# Altium PCB Adafruit VEML7700 STEMMA QT.PcbDoc
Units mil, origin at the board's own origin, x right, y up, seen from the top; angles counter-clockwise.
Board outline 1000 x 700 mil, 2 copper layers (Top, Bottom); 25 components, 9 nets, 59 pads, 14 vias.
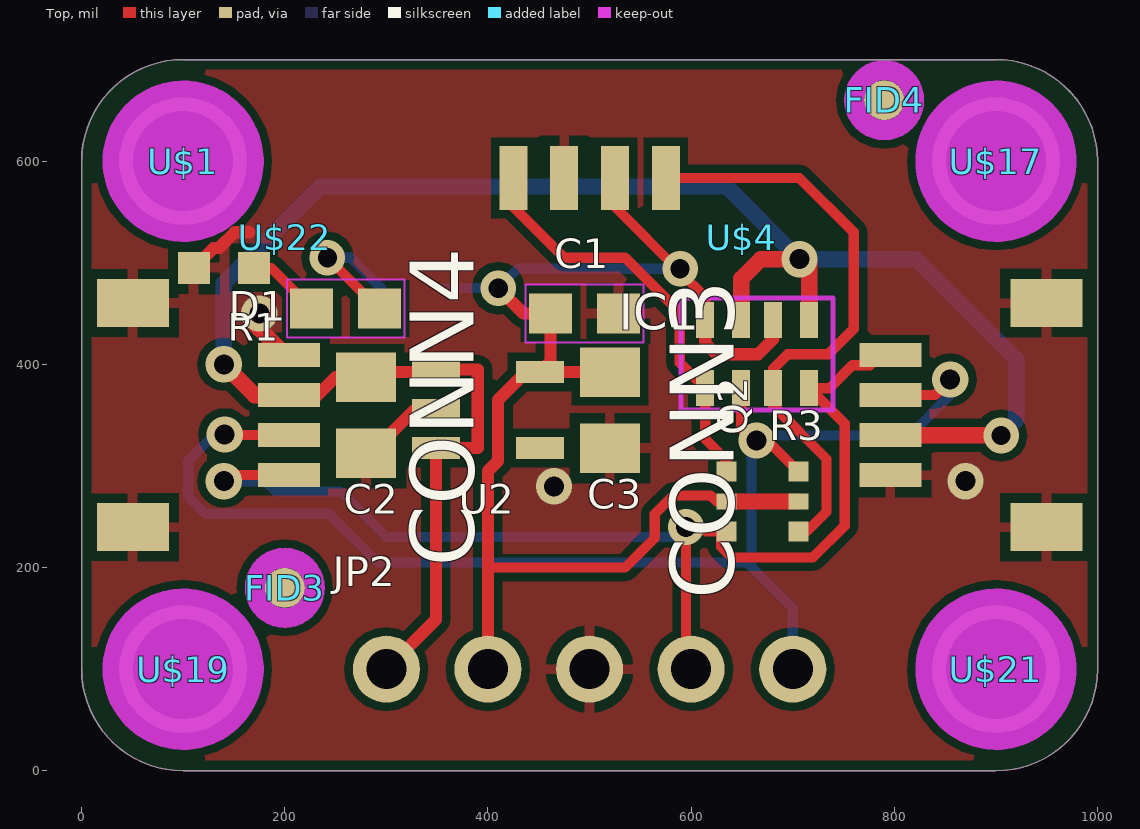
[diagram p0: Top view]
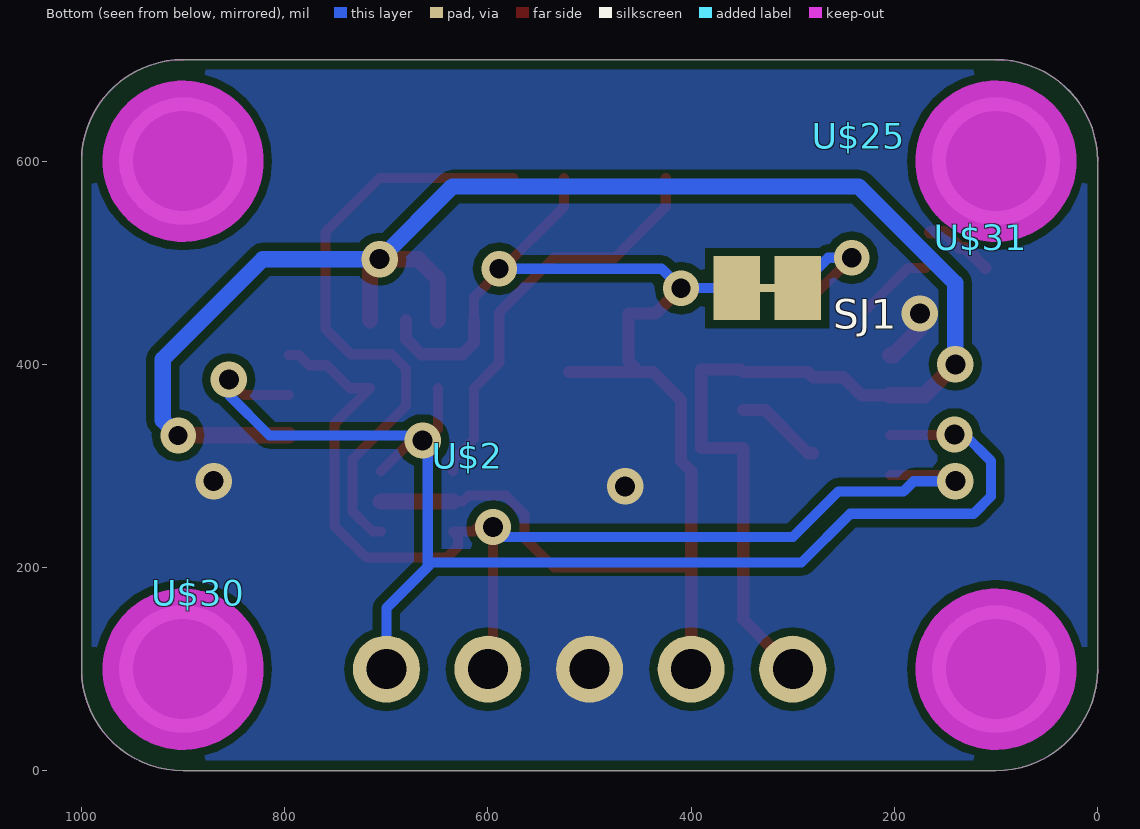
[diagram p1: Bottom view, seen from below]

## Layer stack, top to bottom
Top Solder: solder mask 0.4, Solder Resist, Dk 3.5
Top: signal copper 1.378
Dielectric 1: dielectric 12.6, FR-4, Dk 4.8
Bottom: signal copper 1.378
Bottom Solder: solder mask 0.4, Solder Resist, Dk 3.5

## Board outline
100,700 ccw(c100,600) 0,600 0,100 ccw(c100,100) 100,0 900,0 ccw(c900,100) 1000,100 1000,600 ccw(c900,600) 900,700

## Design rules (kind name [scope] priority, off if disabled: settings)
BoardOutlineClearance mdCopperDimension [All] p1: gap=10 ignorepadtopadclearanceinfootprint=FALSE except(0: Arc-SplitContinuation Track-SplitContinuation SMDPad-SplitContinuation THPad-SplitContinuation Via-SplitContinuation Fill-SplitContinuation Poly-SplitContinuation Region-SplitContinuation Text-SplitContinuation)
Clearance "Clearance (Same Net)" [All] p1: gap=8 ignorepadtopadclearanceinfootprint=FALSE
Clearance [All] p2: gap=8 ignorepadtopadclearanceinfootprint=FALSE
HoleSize HoleSize_For_NetClass_lowpower [InNetClass('lowpower')] p1: absolutevalues=TRUE maxlimit=19 minlimit=19 maxpercent=80.000 minpercent=20.000
HoleSize HoleSize_For_NetClass_highpower [InNetClass('highpower')] p2: absolutevalues=TRUE maxlimit=19 minlimit=19 maxpercent=80.000 minpercent=20.000
HoleSize [All] p3: absolutevalues=TRUE maxlimit=100000 minlimit=15.5 maxpercent=80.000 minpercent=20.000
HoleToHoleClearance mdDrill [All] p1: gap=8 allowstackedmicrovias=TRUE
MinimumSolderMaskSliver [All] p1 off: minsoldermaskwidth=10
PasteMaskExpansion Expansion_SMDPaste_OFF [InPadClass('SMDPaste_OFF')] p1: expansion=0
PasteMaskExpansion mlMinCreamFrame [All] p2: expansion=0
PolygonConnect PolygonConnect_For_PolygonThermal_ON_Width100000_Gap100000 [InPolygonClass('PolygonThermal_ON_Width100000_Gap100000') vs Not IsVia] p1: connectstyle=Relief reliefconductorwidth=10 reliefentries=4 polygonreliefangle="90 Angle" airgapwidth=10
PolygonConnect ThermalVias [IsVia] p2: connectstyle=Direct reliefconductorwidth=10 reliefentries=4 polygonreliefangle="90 Angle" airgapwidth=10
PolygonConnect [All] p3: connectstyle=Relief reliefconductorwidth=10 reliefentries=4 polygonreliefangle="90 Angle" airgapwidth=10
RoutingVias [All] p1: holewidth=15.5 width=31.5 viastyle="Through Hole" minholewidth=15.5 minwidth=31.5 maxholewidth=100 maxwidth=100
SolderMaskExpansion Expansion_SMDSolder_OFF [InPadClass('SMDSolder_OFF')] p1: expansion=0 istentingtop=FALSE
SolderMaskExpansion mlMinStopFrame [All] p2: expansion=2 istentingtop=FALSE
Width Width_For_NetClass_lowpower [InNetClass('lowpower')] p1: maxlimit=10 minlimit=10 preferedwidth=10
Width Width_For_NetClass_highpower [InNetClass('highpower')] p2: maxlimit=24 minlimit=10 preferedwidth=12
Width [All] p3: maxlimit=10 minlimit=8 preferedwidth=8
26 further rules are at their usual default settings.

## Classes and differential pairs
polygon class PolygonThermal_ON_Width100000_Gap100000: Polygon_1_Net_GND Polygon_2_Net_GND
pad class SMDSolder_OFF: SJ1-1 SJ1-2 SJ1-WIRE
pad class SMDPaste_OFF: FID3-1 FID4-1 SJ1-1 SJ1-2 SJ1-WIRE
net class lowpower: 3.3V N$2
net class highpower: GND VCC

## Components (designator, comment, footprint, x,y, rotation, side; value= is the part's Value field where it differs from the comment)
C1 "0.1uF" 0603-NO 495,450 r0 top
C2 "10uF" 0805-NO 280,350 r270 top
C3 "10uF" 0805-NO 520,355 r270 top
CONN3 "" JST_SH4 895,350 r90 top
CONN4 "" JST_SH4 105,350 r270 top
D1 "GREEN" CHIPLED_0603_NOOUTLINE 140,495 r90 top
FID3 "" FIDUCIAL_1MM 200,180 r0 top
FID4 "" FIDUCIAL_1MM 790,660 r0 top
IC1 "VEML7700" VEML7700 500,540 r180 top
JP2 "" 1X05_ROUND 500,100 r0 top
Q2 "BSS138" SOT363 670,265 r90 top
R1 "47K" 0603-NO 260,455 r180 top
R3 "4.7K" RESPACK_4X0603 665,410 r180 top
SJ1 "" SOLDERJUMPER_CLOSEDWIRE 325,475 r0 bottom
U2 "AP2112K-3.3" SOT23-5 400,355 r270 top
U$1 "" MOUNTINGHOLE_2.5_PLATED 100,600 r0 top
U$2 "" KATTNI_STOP 620,310 r180 bottom
U$4 "" ADAFRUIT_3.5MM 650,525 r0 top
U$17 "" MOUNTINGHOLE_2.5_PLATED 900,600 r0 top
U$19 "" MOUNTINGHOLE_2.5_PLATED 100,100 r0 top
U$21 "" MOUNTINGHOLE_2.5_PLATED 900,100 r0 top
U$22 "" ADAFRUIT_3.5MM 200,525 r0 top
U$25 "" PCBFEAT-REV-040 235,625 r180 bottom
U$30 "" STEMMAQT 885,175 r90 bottom
U$31 "" STEMMAQT 115,525 r270 bottom

## Footprints (in the part's own frame and the unit in brackets; to place one, negate y for a bottom-side part, rotate by r counter-clockwise, add the part's x,y. Pads: shape width x height; smd on the part's side, far side on the other; paste and mask are expansions set on the pad)
1X05_ROUND [mil] "1X05_ROUND"
  round 66 hole 39.37: 1(-200,0) 2(-100,0) 3(0,0) 4(100,0) 5(200,0)
0603-NO [mm] "0603-NO"
  rect 1.075x1 smd: 1(-0.85,0) 2(0.85,0)
  Top keep-out lines w0.051: -1.473,-0.729 -1.473,0.729 1.473,0.729 1.473,-0.729 -1.473,-0.729
0805-NO [mil] "0805-NO"
  rect 48.82x59.06 smd: 1(-37.4,0) 2(37.4,0)
ADAFRUIT_3.5MM [mil] "ADAFRUIT_3.5MM"
CHIPLED_0603_NOOUTLINE [mil] "CHIPLED_0603_NOOUTLINE"
  rect 31.5x31.5 smd: A(0,-29.53) C(0,29.53)
FIDUCIAL_1MM [mm] "FIDUCIAL_1MM"
  rrect100% 1x1 smd paste+0: 1(0,0)
  Top keep-out lines w0.5: -0.75,0 ccw(c0,0) 0,-0.75 ; -0.75,0 cw(c0,0) 0,0.75 ; -0.75,0 ccw(c0,0) 0,-0.75 ; -0.75,0 cw(c0,0) 0,0.75 ; 0,-0.75 ccw(c0,0) 0.75,0 ; 0,-0.75 ccw(c0,0) 0.75,0 ; 0,0.75 cw(c0,0) 0.75,0 ; 0,0.75 cw(c0,0) 0.75,0
JST_SH4 [mil] "JST_SH4"
  rect 23.62x61.02 smd: 1(-59.06,98.98) 2(-19.69,98.98) 3(19.69,98.98) 4(59.06,98.98)
  rect 47.24x70.87 smd: MT1(-110.24,-54.57) MT2(110.24,-54.57)
KATTNI_STOP [mil] "KATTNI_STOP"
MOUNTINGHOLE_2.5_PLATED [mil] "MOUNTINGHOLE_2.5_PLATED"
  round 125.98 hole 98.43: P$1(0,0)
  Top keep-out circle w80: c0,0 r39.37
  Top keep-out circle w80: c0,0 r39.37
  Bottom keep-out circle w80: c0,0 r39.37
  Bottom keep-out circle w80: c0,0 r39.37
PCBFEAT-REV-040 [mil] "PCBFEAT-REV-040"
RESPACK_4X0603 [mil] "RESPACK_4X0603"
  rect 17.72x35.43 smd: 1(-51.18,-33.46) 2(-15.75,-33.46) 3(15.75,-33.46) 4(51.18,-33.46) 5(51.18,33.46) 6(15.75,33.46) 7(-15.75,33.46) 8(-51.18,33.46)
  Top keep-out lines w5: 74.8,55.12 74.8,-55.12 -74.8,-55.12 -74.8,55.12 74.8,55.12
SOLDERJUMPER_CLOSEDWIRE [mil] "SOLDERJUMPER_CLOSEDWIRE"
  rect 46x63 smd paste+0 mask+0: 1(-30,0) 2(30,0)
  rect 25x8 smd paste+0 mask+0: WIRE(0,0)
SOT23-5 [mil] "SOT23-5"
  rect 21.65x47.24 smd: 1(-37.4,-51.19) 2(0,-51.19) 3(37.4,-51.19) 4(37.4,51.19) 5(-37.4,51.19)
SOT363 [mil] "SOT363"
  rect 19.69x19.69 smd: 1(-29.53,-35.43) 3(29.53,-35.43) 4(29.53,35.43) 6(-29.53,35.43)
  rect 15.75x19.69 smd: 2(0,-35.43) 5(0,35.43)
STEMMAQT [mil] "STEMMAQT"
VEML7700 [mil] "VEML7700"
  rect 27.56x62.99 smd: 1(-75,-43.31) 2(-25,-43.31) 3(25,-43.31) 4(75,-43.31)

## Part data
C1 R1: library part 0603-NO, PackageName=0603-NO
C2 C3: library part 0805-NO, PackageName=0805-NO
CONN3 CONN4: library part JST_SH4, PackageName=JST_SH4
D1: library part CHIPLED_0603_NOOUTLINE, PackageName=CHIPLED_0603_NOOUTLINE
FID3 FID4: library part FIDUCIAL_1MM, PackageName=FIDUCIAL_1MM
JP2: library part 1X05_ROUND, PackageName=1X05_ROUND
Q2: library part SOT363, PackageName=SOT363
R3: library part RESPACK_4X0603, PackageName=RESPACK_4X0603
SJ1: library part SOLDERJUMPER_CLOSEDWIRE, PackageName=SOLDERJUMPER_CLOSEDWIRE
U2: library part SOT23-5, PackageName=SOT23-5
U$1 U$17 U$19 U$21: library part MOUNTINGHOLE_2.5_PLATED, PackageName=MOUNTINGHOLE_2.5_PLATED
U$2: library part KATTNI_STOP, PackageName=KATTNI_STOP
U$4 U$22: library part ADAFRUIT_3.5MM, PackageName=ADAFRUIT_3.5MM
U$25: library part PCBFEAT-REV-040, PackageName=PCBFEAT-REV-040
U$30 U$31: library part STEMMAQT, PackageName=STEMMAQT
IC1: PackageName=VEML7700

## Via types
v1: diameter 35.69/35.69 (per signal layer), hole 19.69, Top to Bottom, 10 vias
v2: diameter 35/35 (per signal layer), hole 19, Top to Bottom, 4 vias

## Nets (pads, with @x,y where several pads share a name; then routed paths per layer and width w, separated by ;. In a path a pad name is that pad's centre, name@x,y a point inside that pad or via, vN(x,y) a via of type N, cw(c..) or ccw(c..) an arc to the next point about the centre after c; other vN are vias at no path point)
3.3V: C1.1 C3.1 IC1.2 JP2.2 Q2.2 Q2.5 R3.2 R3.4 SJ1.2 U2.5 | length 1405.6
  Top w10: 400,200 535,200 564.16,229.16 564.16,252.78 582.22,270.84 619.16,270.84 625,265 Q2.5 ; IC1.2 525,555 v2@589.07,490.93 ; v2(589.07,494.07) v2@589.07,490.93 ; R3.4 613.82,466.18 v2@589.07,490.93
  Top w12: JP2.2 400,200 400,295 410,305 410,365 437.4,392.4 U2.5 ; v2(410,475) 435,450 C1.1 461.54,402.75 U2.5 ; C3.1 U2.5 ; R3.4 613.82,421.18 625,410 665.75,410 680.75,425 R3.2
  Top w16: Q2.5 Q2.2
  Bottom w10: SJ1.2 v2(410,475) 429.07,494.07 v2(589.07,494.07)
GND: C1.2 C2.2 C3.2 CONN3.1 CONN3.MT1 CONN3.MT2 CONN4.1 CONN4.MT1 CONN4.MT2 D1.C IC1.3 JP2.3 U2.2 | length 210.1
  Top w12: D1.C 130.1,514.63 135.36,514.63 150.73,530 165,530 ; C2.2 285,312.6 327.4,355 U2.2
  Top w16: v1(175,450) 175,435 200.94,409.06 CONN4.1
  other v1: 465,280 870,285
N$1: D1.A R1.2 | length 73.6
  Top w10: D1.A 186.46,495 R1.2 R1.2
N$2: R1.1 SJ1.1 SJ1.WIRE | length 137.6
  Top w10: v2(242,505) 292,455 R1.1
  Bottom w10: v2(242,505) 265,505 SJ1.1
SCL: CONN3.4 CONN4.4 JP2.4 Q2.6 R3.8 | length 1131
  Top w10: v1(140,285) 145.94,290.94 CONN4.4 ; JP2.4 595,105 v1(595,240) 610,240 614.53,235.47 Q2.6 629.55,230.45 629.55,220.45 640,210 720,210 751.18,241.18 751.18,341.54 R3.8 736.18,376.54 758.7,399.06 776.02,399.06 786.02,409.06 CONN3.4
  Bottom w10: v1(140,285) 180.91,285 190.91,275 255,275 300,230 585,230 v1(595,240)
SCL_3V: IC1.1 Q2.1 R3.7 | length 595.9
  Top w10: IC1.1 706.69,583.31 760,530 760,435 735,410 695,410 680.75,395.75 R3.7 680.75,359.25 733.18,306.82 733.18,255 713.65,235.47 Q2.1
SDA: CONN3.3 CONN4.3 JP2.5 Q2.3 R3.6 | length 1388.4
  Top w10: v1(140.89,330.89) 140.89,330.32 CONN4.3 ; R3.6 649.25,336.54 660.79,325 v1(664.25,325) 674.96,325 Q2.3 ; CONN3.3 839.69,369.69 v1(855,385)
  Bottom w10: v1(140.89,330.89) 130.89,330.89 105,305 105,270 122,253 243.38,253 291.38,205 655,205 659.25,200.75 ; v1(664.25,325) v1@659.25,330 ; JP2.5 700,160 659.25,200.75 ; v1(855,385) 855,370 815,330 v1@659.25,330 ; 659.25,200.75 v1@659.25,330
SDA_3V: IC1.4 Q2.4 R3.5 | length 410.7
  Top w10: IC1.4 425,555 475,505 535,505 588.82,451.18 588.82,401.54 R3.5 613.82,326.54 634.57,305.79 Q2.4
VCC: C2.1 CONN3.2 CONN4.2 JP2.1 R3.1 R3.3 U2.1 U2.3 | length 1962.3
  Top w12: CONN4.2 232.28,369.69 250,387.4 C2.1 285,392.4 U2.1 351.41,395 390,395 390,317.6 U2.3 348.82,148.82 JP2.1
  Top w16: v1(140,400) 170.32,369.69 CONN4.2 ; R3.3 649.25,484.25 668.46,503.46 v1(706.54,503.46) 711.18,503.46 716.18,498.46 R3.1 ; CONN3.2 904.69,330.32 v2(905,330)
  Bottom w16: v1(140,400) 140,480 235,575 635,575 v1(706.54,503.46) 821.54,503.46 920,405 920,345 v2(905,330)
pads on no net: FID3.1 FID4.1 U2.4 U$1.P$1 U$17.P$1 U$19.P$1 U$21.P$1

## Polygon pours and split planes (outlines as drawn)
GND on Top "Polygon_1_Net_GND" (solid, remove dead copper, pour order 1): -5,705 1005,705 1005,-5 -5,-5
GND on Bottom "Polygon_2_Net_GND" (solid, remove dead copper, pour order 0): -5,705 1005,705 1005,-5 -5,-5

## Keep-outs
Keep-Out Layer:
  the board outline again, w0

## Silkscreen, mask and mechanical layers (free items; w line width, h text height)
Dimension:
  the board outline again, w0
tPlace:
  lines w6: 365,600 365,690 635,690 635,600
  text "on" at 15,490 h34
  text "VEML7700" at 218.68,212.96 h49.3
  text "3Vo" at 349.92,143.25 h34
  text "SCL" at 554.92,143.25 h34
  text "VIN" at 252.75,13.25 h34
  text "GND" at 454.92,13.25 h34
  text "SDA" at 654.92,13.25 h34
bPlace:
  text "VEML7700" at 706.32,592.96 h49.3
  text "Light/Lux Sensor" at 752.85,527.91 h34
  text "LED" at 505.22,463.11 h34
  text "0 lux to ~120 klux" at 769.01,212.91 h34
  text "I2C addr 0x10" at 689.7,152.91 h34
  text "VLogic/Vcc: 3-5VDC" at 798.65,18.93 h34

## Dimensions
100,150 to 100,50 on tFinish
520,0 to 485,700 on tFinish
1000,360 to 0,245 on tFinish
900,100 to 100,100 on tFinish
500,100 to 500,600 on tFinish

## Text inside footprints (layer, text, board x,y; h text height)
CONN3: Top Value "JST SH 4" at 1052.72,218.9 h62 r90
CONN4: Top Value "JST SH 4" at -52.72,481.1 h62 r270
U$25: tPlace ">REV" at 249,605 h62